# EAGLE board Karaoke Machine - Pedro Soares dos Santos (EAGLE 9.7.0)

Size 242.08 x 69.4 mm. Coordinates in mm from the lower left corner, seen from the top.
Outline: 0,0 242.08,0 242.08,69.4 0,69.4 0,0
Copper layers (1*16): Top 0.035mm / dielectric 1.5mm / Bottom 0.035mm
Design rules "default": minimum track width 6mil, minimum drill 0.35mm, track to track 6mil, track to pad 6mil, pad to pad 6mil, via to via 6mil, smd to smd 6mil, copper to edge 40mil, drill to drill 6mil, minimum pad ring 10mil, minimum via ring 8mil, stop-mask expansion 4mil, vias tented up to drill 0mil, thermal gap 10mil

## Footprints (pad centres in the part's own frame; a part is rotated, then mirrored left to right if it is on the bottom)
LEDRD254W60D565H860B_B = drill 0.981 pad 1.581: 1 -1.27,0; 2 1.27,0
LEDRD254W60D565H860B = drill 0.981 pad 1.581: 1 -1.27,0; 2 1.27,0
LEDRD254W60D565H860B_O = drill 0.981 pad 1.581: 1 -1.27,0; 2 1.27,0
LEDRD254W60D565H860B_G = drill 0.981 pad 1.581: 1 -1.27,0; 2 1.27,0
PIEZO = drill 1 pad 1.6: 1 -3.5,0; 2 3.5,0
RESAD1016W63L850D250B = drill 0.83 pad 1.43: 1 -5.08,0; 2 5.08,0
SWITCH-MOMENTARY-PTH-6.5MM = drill 1.016 pad 1.88: 1 -3.251,2.261; 2 3.251,2.261; 3 -3.251,-2.261; 4 3.251,-2.261
ARDUINO-UNO-R3-SHIELD = drill 1.016 pad 1.88: 3.3V 24.13,-2.54; 5V 24.13,0; A0 24.13,12.7; A1 24.13,15.24; A2 24.13,17.78; A3 24.13,20.32; A4 24.13,22.86; A5 24.13,25.4; AREF -24.13,-13.97; D2 -24.13,20.32; D3 -24.13,17.78; D4 -24.13,15.24; D5 -24.13,12.7; D6 -24.13,10.16; D7 -24.13,7.62; D8 -24.13,3.81; D9 -24.13,1.27; D10 -24.13,-1.27; D11 -24.13,-3.81; D12 -24.13,-6.35; D13 -24.13,-8.89; GND@0 24.13,2.54; GND@1 24.13,5.08; GND@2 -24.13,-11.43; IOREF 24.13,-7.62; NC 24.13,-10.16; RES 24.13,-5.08; RX -24.13,25.4; SCL -24.13,-19.05; SDA -24.13,-16.51; TX -24.13,22.86; VIN 24.13,7.62
JHD-162A = drill 1.016 long: 1 -19.05,0; 2 -16.51,0; 3 -13.97,0; 4 -11.43,0; 5 -8.89,0; 6 -6.35,0; 7 -3.81,0; 8 -1.27,0; 9 1.27,0; 10 3.81,0; 11 6.35,0; 12 8.89,0; 13 11.43,0; 14 13.97,0; 15 16.51,0; 16 19.05,0

## Placement (x,y rotation side)
D1  BLUE  [LEDRD254W60D565H860B_B]  165.9,49.2 0 top
D2  RED  [LEDRD254W60D565H860B]  150.66,49.2 0 top
D3  ORANGE  [LEDRD254W60D565H860B_O]  158.28,49.2 0 top
D4  GREEN  [LEDRD254W60D565H860B_G]  173.52,49.2 0 top
PIEZO1  PIEZO  [PIEZO]  188.76,54.28 0 top
R1  1k  [RESAD1016W63L850D250B]  139.23,41.58 90 top
R2  1k  [RESAD1016W63L850D250B]  106.21,59.36 90 top
R3  1k  [RESAD1016W63L850D250B]  223.05,23.8 90 top
R4  1k  [RESAD1016W63L850D250B]  235.75,23.8 90 top
R5  1k  [RESAD1016W63L850D250B]  182.41,39.04 90 top
R8  1k  [RESAD1016W63L850D250B]  207.81,23.8 90 top
R9  1k  [RESAD1016W63L850D250B]  151.93,59.36 90 top
R10  1k  [RESAD1016W63L850D250B]  159.55,59.36 90 top
R11  1k  [RESAD1016W63L850D250B]  167.17,59.36 90 top
R12  1k  [RESAD1016W63L850D250B]  174.79,59.36 90 top
S1  SWITCH_MOMENTARY  [SWITCH-MOMENTARY-PTH-6.5MM]  220.51,40.31 90 top
S2  SWITCH_MOMENTARY  [SWITCH-MOMENTARY-PTH-6.5MM]  233.21,40.31 90 top
S4  SWITCH_MOMENTARY  [SWITCH-MOMENTARY-PTH-6.5MM]  205.27,40.31 90 top
U1  ARDUINO-UNO-R3-SHIELD  [ARDUINO-UNO-R3-SHIELD]  47.88,39.56 270 top
U4  LCD-16X2JHD-162A  [JHD-162A]  120.18,36.63 0 top

## Library data of the parts
D1 = Tinkercad; CATEGORY: Opto-Electronic; SUB-CATEGORY: LED; VALUE: LED_BLUE
D2 = Tinkercad; CATEGORY: Opto-Electronic; SUB-CATEGORY: LED; VALUE: LED_RED
D3 = Tinkercad; CATEGORY: Opto-Electronic; SUB-CATEGORY: LED; VALUE: LED_ORANGE
D4 = Tinkercad; CATEGORY: Opto-Electronic; SUB-CATEGORY: LED; VALUE: LED_GREEN
PIEZO1 R1-R5 R8-R12 S1 S2 S4 U1 U4 = Tinkercad

## Nets
D1_C: D1.2 R11.1
D2_C: D2.2 R9.1
D3_C: D3.2 R10.1
D4_C: D4.2 R12.1
PIEZO1_1: PIEZO1.1 R5.2
U1_5V: S1.1 S1.2 S2.1 S2.2 S4.1 S4.2 U1.5V U4.2 U4.15
U1_D2: U1.D2 U4.14
U1_D3: U1.D3 U4.13
U1_D4: U1.D4 U4.12
U1_D5: U1.D5 U4.11
U1_D6: U1.D6 U4.6
U1_D7: U1.D7 U4.4
U1_D8: D3.1 U1.D8
U1_D9: PIEZO1.2 U1.D9
U1_D10: R8.2 S4.3 S4.4 U1.D10
U1_D11: D2.1 U1.D11
U1_D12: R4.2 S2.3 S2.4 U1.D12
U1_D13: R3.2 S1.3 S1.4 U1.D13
U1_GND: R1.2 R2.2 R3.1 R4.1 R5.1 R8.1 R9.2 R10.2 R11.2 R12.2 U1.GND@0 U1.GND@1 U1.GND@2 U4.1 U4.5
U1_RX: D4.1 U1.RX
U1_TX: D1.1 U1.TX
U4_LED-: R1.1 U4.16
U4_VO: R2.1 U4.3

## Tracks (layer width: path | path; a pad name or v marks a point on that pad's centre or on a via)
D1_C  (1 unrouted)
D2_C  (1 unrouted)
D3_C  (1 unrouted)
D4_C  (1 unrouted)
PIEZO1_1  (1 unrouted)
U1_5V  (8 unrouted)
U1_D2  (1 unrouted)
U1_D3  (1 unrouted)
U1_D4  (1 unrouted)
U1_D5  (1 unrouted)
U1_D6  (1 unrouted)
U1_D7  (1 unrouted)
U1_D8  (1 unrouted)
U1_D9  (1 unrouted)
U1_D10  (3 unrouted)
U1_D11  (1 unrouted)
U1_D12  (3 unrouted)
U1_D13  (3 unrouted)
U1_GND  (14 unrouted)
U1_RX  (1 unrouted)
U1_TX  (1 unrouted)
U4_LED-  (1 unrouted)
U4_VO  (1 unrouted)